# Altium PCB PCB1.PcbDoc (part 1 of 2)
Units mm, origin at the board's own origin, x right, y up, seen from the top; angles counter-clockwise.
Board outline 893.19 x 388.24 mm, 2 copper layers (Top Layer, Bottom Layer); 223 components, 120 nets, 683 pads, 243 vias.
Unrouted connection lines stored in the file: 6.
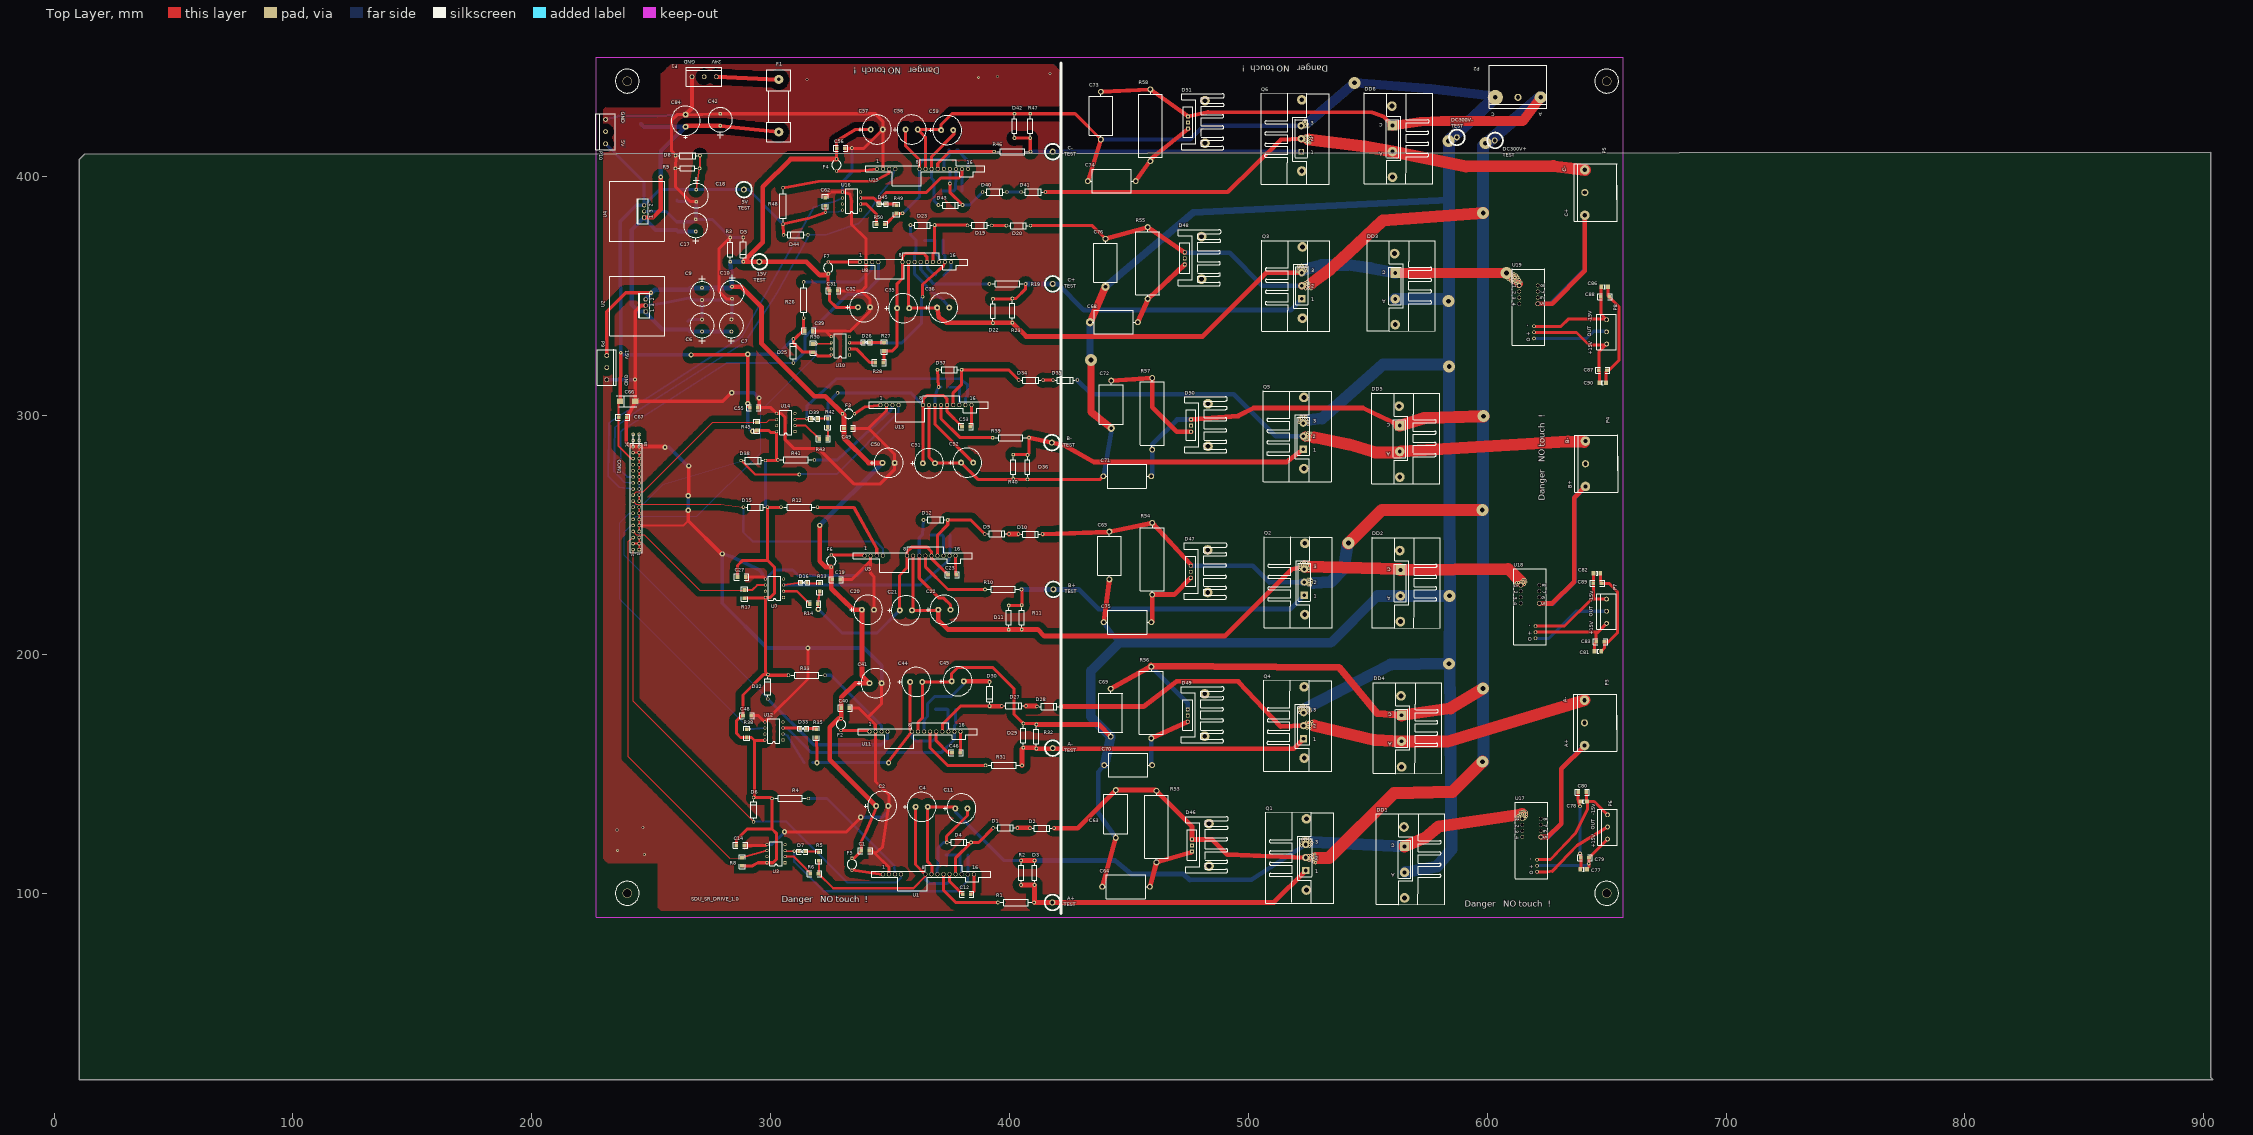
[diagram p0: Top Layer view]
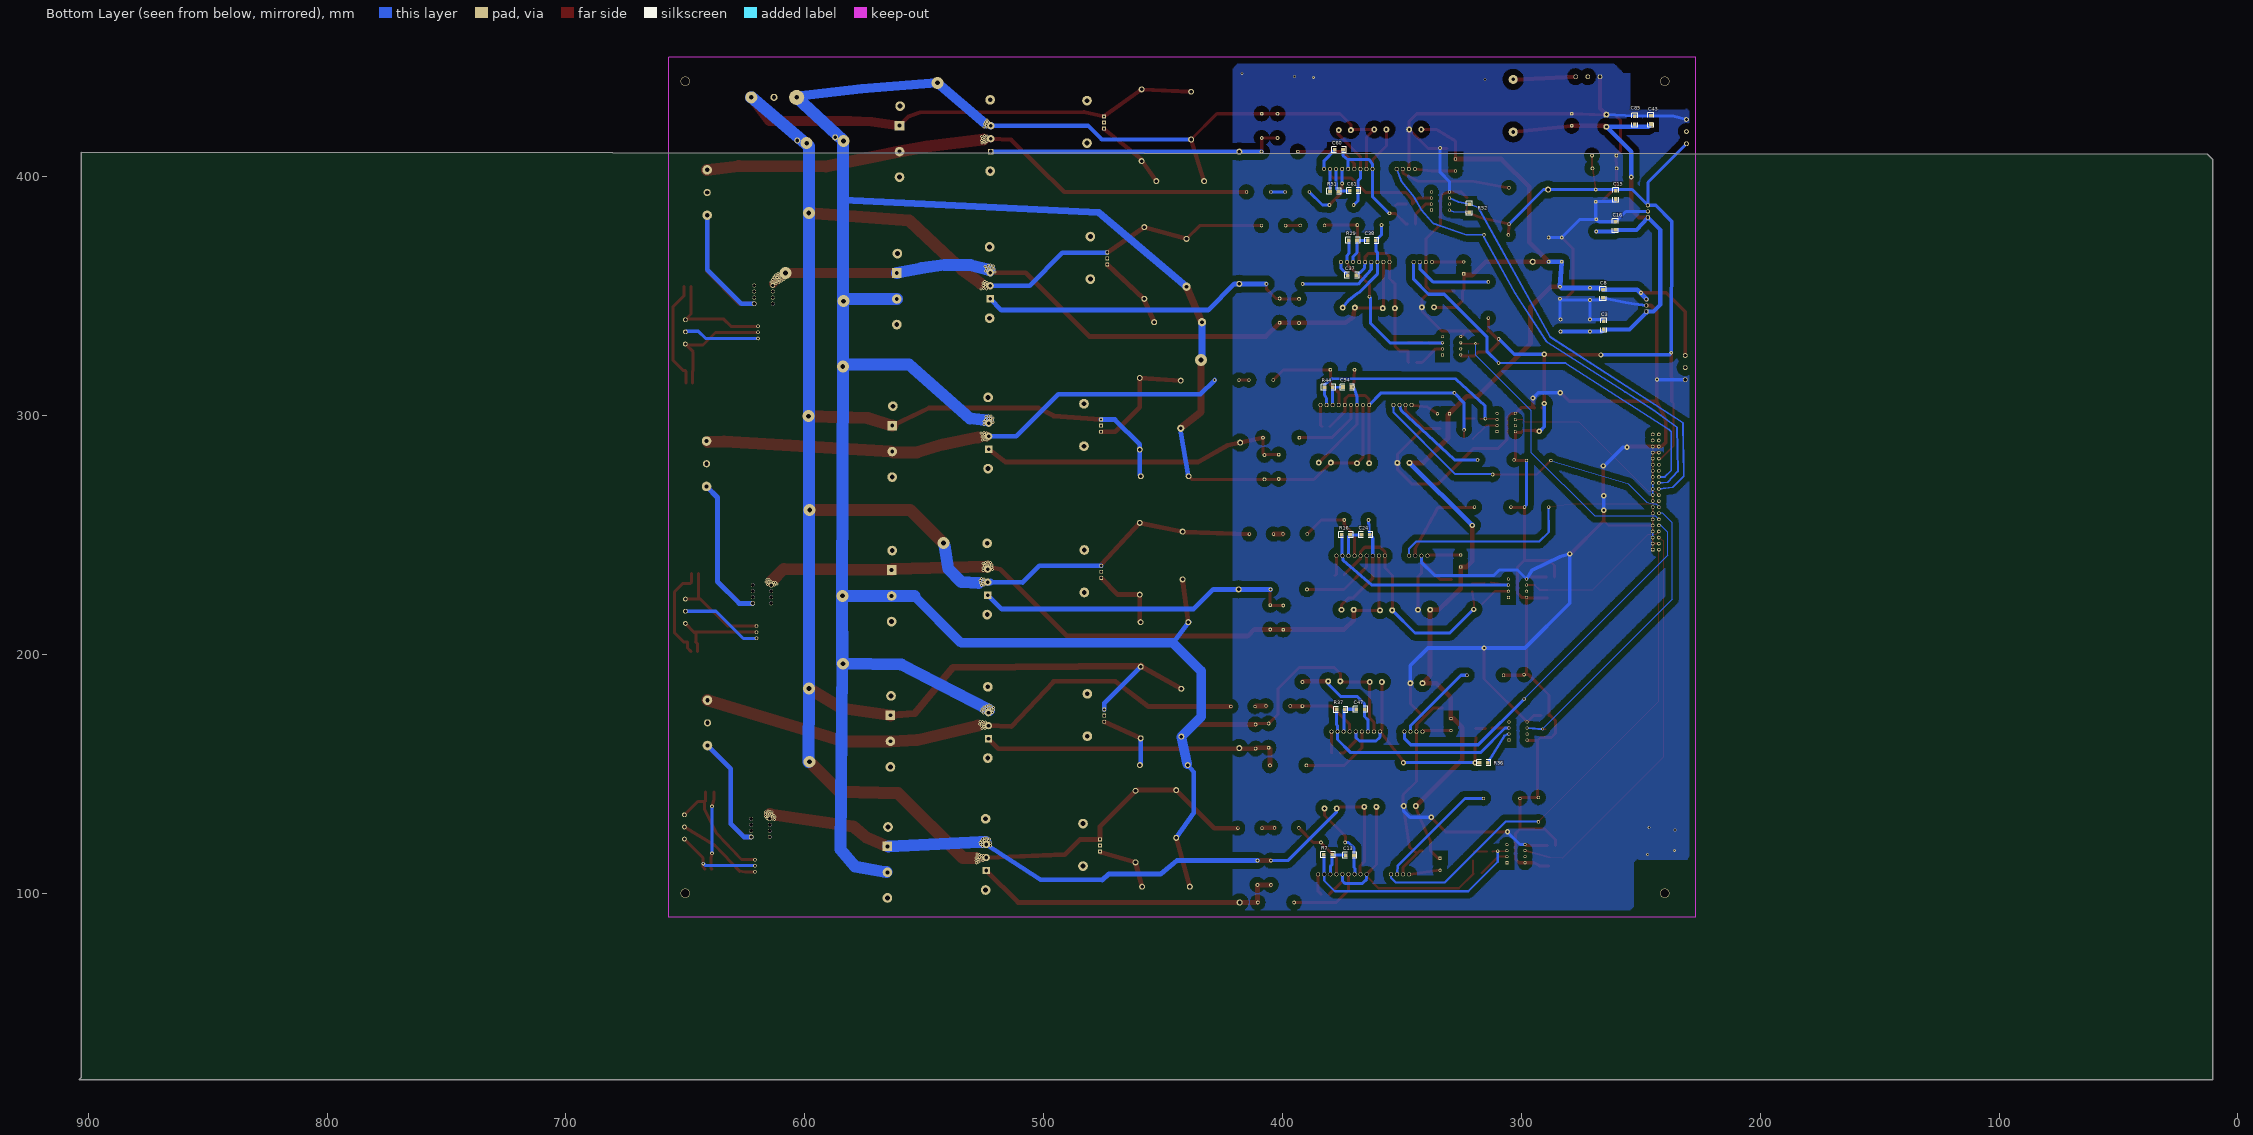
[diagram p1: Bottom Layer view, seen from below]

## Layer stack, top to bottom
Top Layer: signal copper 0.0356
Dielectric: dielectric 0.32, FR-4, Dk 4.8
Bottom Layer: signal copper 0.0356

## Board outline
12.827,409.448 10.541,407.162 10.541,21.971 903.732,21.971 902.97,22.733 902.97,410.21

## Design rules (kind name [scope] priority, off if disabled: settings)
Clearance [All] p1: gap=0.508
ComponentClearance [All] p1 off: gap=0.254 collisioncheckmode=3 verticalgap=0.254 showdistances=FALSE
HoleToHoleClearance [All] p1 off: gap=0.254 allowstackedmicrovias=TRUE
MinimumSolderMaskSliver [All] p1 off: minsoldermaskwidth=0.254
PlaneClearance [All] p1: clearance=2.032
PlaneConnect [All] p1: planeconnectstyle=Direct reliefexpansion=0.508 reliefentries=4 reliefconductorwidth=0.254 reliefairgap=0.254
PolygonConnect [All] p1: connectstyle=Direct reliefconductorwidth=0.254 reliefentries=4 polygonreliefangle="90 Angle" airgapwidth=0.254
RoutingVias [All] p1: holewidth=0.711 width=1.27 viastyle="Through Hole" minholewidth=0.711 minwidth=1.27 maxholewidth=1.27 maxwidth=2.54
SilkToSilkClearance [All] p1 off: silktosilkclearance=0.254
SilkToSolderMaskClearance SilkscreenOverComponentPads [IsPad] p1 off: minsilkscreentomaskgap=0.254 clearancetoexposedcopper=TRUE
SolderMaskExpansion [All] p1: expansion=0.102
UnConnectedPin [All] p1 off:
Width [All] p1: maxlimit=7.62 minlimit=0.254 preferedwidth=1.27 minimp=50.000000 maximp=50.000000 favimp=50.000000
21 further rules are at their usual default settings.

## Classes and differential pairs
component class main1: C63 C64 C65 C68 C69 C70 C71 C72 C73 C74 C75 C76 C77 C78 C79 C80 C81 C82 C83 C86 C87 C88 C89 C90 D46 D47 D48 D49 D50 D51 DD1 DD2 DD3 DD4 DD5 DD6 P2 P3 P4 P5 P6 P7 P8 Q1 Q2 Q3 Q4 Q5 Q6 R53 R54 R55 R56 R57 R58 U17 U18 U19
component class driveIII: C40 C41 C42 C43 C44 C45 C46 C47 C48 C49 C50 C51 C52 C53 C54 C55 C56 C57 C58 C59 C60 C61 C62 C66 C67 C84 C85 CON1 D27 D28 D29 D30 D32 D33 D34 D35 D36 D37 D38 D39 D40 D41 D42 D43 D44 D45 F1 F2 F3 F4 P1 R31 R32 R33 R35 R36 R37 R38 R39 R40 R41 R42 R43 R44 R45 R46 R47 R48 R49 R50 R51 R52 U11 U12 U13 U14 U15 U16
component class driveII: C1 C2 C3 C4 C6 C7 C8 C9 C10 C11 C12 C13 C14 C15 C16 C17 C18 C19 C20 C21 C22 C23 C24 C27 C31 C32 C35 C36 C37 C38 C39 D1 D2 D3 D4 D5 D6 D7 D8 D9 D10 D11 D12 D15 D16 D19 D20 D22 D23 D25 D26 F5 F6 F7 P9 P10 R1 R2 R3 R4 R5 R6 R7 R8 R9 R10 R11 R12 R13 R14 R16 R17 R19 R23 R26 R27 R28 R29 R30 U1 U2 U3 U4 U5 U7 U8 U10 U?

## Components (designator, comment, footprint, x,y, rotation, side; value= is the part's Value field where it differs from the comment)
C1 "Cap" 1206#1 341.376,117.729 r180 top
C2 "Cap Pol1" 电解电容1000uF#1 344.17,136.525 r0 top
C3 "Cap" 1206#1 265.43,339.471 r270 bottom
C4 "Cap Pol1" 电解电容1000uF#1 360.68,136.144 r0 top
C6 "Cap Pol1" 电解电容470uf 271.272,335.153 r270 top
C7 "Cap Pol1" 电解电容470uf 283.591,335.153 r270 top
C8 "Cap" 1206#1 265.811,349.25 r90 bottom
C9 "Cap Pol1" 电解电容470uf 271.272,353.441 r90 top
C10 "Cap Pol1" 电解电容470uf 283.845,353.949 r90 top
C11 "Cap Pol1" 电解电容1000uF#1 377.317,135.509 r0 top
C12 "预留" 1206#1 380.365,99.568 r0 top
C13 "预留" 1206#1 370.078,115.951 r0 bottom
C14 "Cap" 1206#1 285.623,120.015 r0 top
C15 "Cap" 1206#1 260.477,390.652 r90 bottom
C16 "Cap" 1206#1 260.604,381.127 r270 bottom
C17 "Cap Pol1" 电解电容470uf 268.605,377.063 r270 top
C18 "Cap Pol1" 电解电容470uf 268.859,394.589 r90 top
C19 "Cap" 1206#1 329.184,231.267 r180 top
C20 "Cap Pol1" 电解电容1000uF#1 338.201,218.694 r0 top
C21 "Cap Pol1" 电解电容1000uF#1 354.076,218.44 r0 top
C22 "Cap Pol1" 电解电容1000uF#1 370.205,218.694 r0 top
C23 "预留" 1206#1 374.269,233.299 r0 top
C24 "预留" 1206#1 363.474,250.063 r0 bottom
C27 "Cap" 1206#1 286.131,232.41 r0 top
C31 "Cap" 1206#1 328.041,352.171 r180 top
C32 "Cap Pol1" 电解电容1000uF#1 336.55,345.313 r0 top
C35 "Cap Pol1" 电解电容1000uF#1 352.933,344.932 r0 top
C36 "Cap Pol1" 电解电容1000uF#1 369.697,345.186 r0 top
C37 "预留" 1206#1 369.189,358.775 r0 bottom
C38 "预留" 1206#1 360.934,373.253 r0 bottom
C39 "Cap" 1206#1 314.198,335.407 r0 top
C40 "Cap" 1206#1 332.994,177.546 r180 top
C41 "Cap Pol1" 电解电容1000uF#1 341.376,187.96 r0 top
C42 "Cap Pol1" 电解电容470uf 278.892,421.259 r270 top
C43 "Cap" 1206#1 245.745,425.45 r270 bottom
C44 "Cap Pol1" 电解电容1000uF#1 358.394,188.468 r0 top
C45 "Cap Pol1" 电解电容1000uF#1 375.793,188.722 r0 top
C46 "预留" 1206#1 375.92,158.75 r0 top
C47 "预留" 1206#1 365.633,177.038 r0 bottom
C48 "Cap" 1206#1 288.417,174.371 r0 top
C49 "Cap" 1206#1 334.137,294.64 r180 top
C50 "Cap Pol1" 电解电容1000uF#1 346.837,280.162 r0 top
C51 "Cap Pol1" 电解电容1000uF#1 363.728,280.035 r0 top
C52 "Cap Pol1" 电解电容1000uF#1 379.73,280.289 r0 top
C53 "预留" 1206#1 380.111,295.402 r0 top
C54 "预留" 1206#1 371.221,311.912 r0 bottom
C55 "Cap" 1206#1 291.211,303.276 r0 top
C56 "Cap" 1206#1 331.089,411.861 r180 top
C57 "Cap Pol1" 电解电容1000uF#1 341.884,419.735 r0 top
C58 "Cap Pol1" 电解电容1000uF#1 356.489,419.735 r0 top
C59 "Cap Pol1" 电解电容1000uF#1 371.348,419.481 r0 top
C60 "预留" 1206#1 374.65,411.226 r0 bottom
C61 "预留" 1206#1 368.427,394.081 r0 bottom
C62 "Cap" 1206#1 322.834,387.858 r90 top
C63 "Cap" 无感电容15*6#1 444.5,123.19 r90 top
C64 "Cap" 无感电容15*6#1 438.785,102.743 r0 top
C65 "Cap" 无感电容15*6#1 441.833,231.394 r90 top
C66 "Cap Pol1" 7343 240.157,305.943 r0 top
C67 "Cap" 1206#1 239.776,299.339 r180 top
C68 "Cap" 无感电容15*6#2 433.705,339.09 r0 top
C69 "Cap" 无感电容15*6#1 442.341,165.608 r90 top
C70 "Cap" 无感电容15*6#1 439.674,153.67 r0 top
C71 "Cap" 无感电容15*6#1 439.293,274.574 r0 top
C72 "Cap" 无感电容15*6#3 442.595,294.64 r90 top
C73 "Cap" 无感电容15*6#1 438.277,415.544 r90 top
C74 "Cap" 无感电容15*6#1 432.816,398.145 r0 top
C75 "Cap" 无感电容15*6#1 439.42,213.487 r0 top
C76 "Cap" 无感电容15*6#2 440.182,353.949 r90 top
C77 "Cap Pol1" 1206#2 640.334,110.109 r180 top
C78 "Cap Pol1" 1206#2 640.334,138.43 r0 top
C79 "Cap" 1206#1 639.191,114.808 r0 top
C80 "Cap" 1206#1 641.477,142.367 r180 top
C81 "Cap Pol1" 1206#2 646.303,201.295 r0 top
C82 "Cap Pol1" 1206#2 645.922,233.934 r180 top
C83 "Cap" 1206#1 649.097,205.232 r180 top
C84 "Cap Pol1" 电解电容1000uF#2 264.414,420.878 r90 top
C85 "Cap" 1206#1 252.476,425.323 r270 bottom
C86 "Cap Pol1" 1206#2 649.097,353.949 r180 top
C87 "Cap" 1206#1 650.113,318.897 r180 top
C88 "Cap" 1206#1 647.573,349.758 r0 top
C89 "Cap" 1206#1 644.398,229.743 r0 top
C90 "Cap Pol1" 1206#2 648.335,313.69 r0 top
CON1 "Header 18X2" HDR2X18 244.983,243.84 r90 top
D1 "FR107" DIODE-0.4 398.272,127.381 r0 top
D2 "FR107" DIODE-0.4 413.639,127.254 r0 top
D3 "1.5KE18CA" AXIAL0.4 410.464,113.665 r270 top
D4 "1N4751" DIODE0.4 373.761,121.285 r0 top
D5 "Diode 1N4007" DIODE0.4 288.544,374.523 r270 top
D6 "Diode 1N4007" DIODE-0.4 292.862,135.001 r90 top
D7 "LED" 0805D 313.817,116.205 r180 top
D8 "Diode 1N4007" DIODE0.4 260.223,408.813 r0 top
D9 "FR107" DIODE-0.4 394.716,250.444 r0 top
D10 "FR107" DIODE-0.4 408.813,250.317 r0 top
D11 "1.5KE18CA" AXIAL0.4 399.669,210.312 r90 top
D12 "1N4751" DIODE0.4 363.982,256.286 r0 top
D15 "Diode 1N4007" DIODE-0.4 293.624,261.62 r0 top
D16 "LED" 0805D 314.579,228.854 r180 top
D19 "FR107" DIODE-0.4 387.477,379.603 r0 top
D20 "FR107" DIODE-0.4 403.733,379.476 r0 top
D22 "1.5KE18CA" AXIAL0.4 393.065,338.709 r90 top
D23 "1N4751" DIODE0.4 358.521,379.73 r0 top
D25 "Diode 1N4007" DIODE-0.4 309.499,327.025 r90 top
D26 "LED" 0805D 340.741,329.438 r180 top
D27 "FR107" DIODE-0.4 401.828,178.435 r0 top
D28 "FR107" DIODE-0.4 416.56,178.181 r0 top
D29 "1.5KE18CA" AXIAL0.4 405.765,171.069 r270 top
D30 "1N4751" DIODE0.4 391.668,188.468 r270 top
D32 "Diode 1N4007" DIODE-0.4 298.831,186.436 r90 top
D33 "LED" 0805D 314.198,167.767 r180 top
D34 "FR107" DIODE-0.4 408.94,314.833 r0 top
D35 "FR107" DIODE-0.4 423.291,314.833 r0 top
D36 "1.5KE18CA" AXIAL0.4 407.543,273.304 r90 top
D37 "1N4751" DIODE0.4 369.824,319.151 r0 top
D38 "Diode 1N4007" DIODE-0.4 292.735,281.178 r0 top
D39 "LED" 0805D 318.897,297.434 r180 top
D40 "FR107" DIODE-0.4 393.827,393.573 r0 top
D41 "FR107" DIODE-0.4 409.956,393.573 r0 top
D42 "1.5KE18CA" AXIAL0.4 402.082,426.339 r270 top
D43 "1N4751" DIODE0.4 370.205,388.112 r0 top
D44 "Diode 1N4007" DIODE-0.4 310.515,375.666 r180 top
D45 "LED" 0805D 347.472,387.35 r180 top
D46 "MUR860 8A/600V" TO-220_SANRE 476.377,122.555 r180 top
D47 "MUR860 8A/600V" TO-220_SANRE 475.869,237.109 r180 top
D48 "MUR860 8A/600V" TO-220_SANRE 473.329,368.3 r180 top
D49 "MUR860 8A/600V" TO-220_SANRE 474.599,176.911 r180 top
D50 "MUR860 8A/600V" TO-220_SANRE 475.996,298.323 r180 top
D51 "MUR860 8A/600V" TO-220_SANRE 474.726,425.196 r180 top
DD1 "RURG8060" TO247dio 565.15,119.634 r180 top
DD2 "RURG8060" TO247dio 563.372,235.331 r180 top
DD3 "RURG8060" TO247dio 561.213,359.664 r180 top
DD4 "RURG8060" TO247dio 563.88,174.498 r180 top
DD5 "RURG8060" TO247dio 563.118,295.783 r180 top
DD6 "RURG8060" TO247dio 560.07,421.386 r180 top
F1 "Fuse 1　4A" FUSE 303.403,440.69 r270 top
F2 "Fuse 1　2A" CAPR5-4X5 329.438,170.688 r270 top
F3 "Fuse 1　2A" CAPR5-4X5 332.613,300.736 r0 top
F4 "Fuse 1　2A" CAPR5-4X5 327.533,404.876 r270 top
F5 "Fuse 1　2A" CAPR5-4X5 334.01,112.141 r270 top
F6 "Fuse 1　2A" CAPR5-4X5 325.374,239.141 r90 top
F7 "Fuse 1　2A" CAPR5-4X5 324.104,361.823 r90 top
P1 "Header 3" PHENOX-3 267.081,441.833 r0 top
P2 "Header 3" 端子9.5mm-3#1 621.411,442.595 r180 top
P3 "Header 3" 端子9.5mm-3#2 650.113,162.814 r90 top
P4 "Header 3" 端子9.5mm-3#2 650.494,271.272 r90 top
P5 "Header 3" 端子9.5mm-3#3 650.24,384.81 r90 top
P6 "SEN_A" PHENOX-3 650.367,122.682 r90 top
P7 "SEN_B" PHENOX-3 649.986,212.979 r90 top
P8 "SEN_C" PHENOX-3 649.986,329.946 r90 top
P9 "预留不焊" PHENOX-3 231.394,325.12 r270 top
P10 "预留不焊" PHENOX-3 230.886,413.766 r90 top
Q1 "IGBT-N" TO247#1 524.002,109.474 r0 top
Q2 "IGBT-N" TO247#1 523.367,224.79 r0 top
Q3 "IGBT-N" TO247#2 522.351,348.869 r0 top
Q4 "IGBT-N" TO247#3 523.113,164.719 r0 top
Q5 "IGBT-N" TO247#1 522.986,285.877 r0 top
Q6 "IGBT-N" TO247#4 522.097,410.464 r0 top
R1 "5R" AXIAL0.6 395.097,96.139 r0 top
R2 "10K" AXIAL0.4 404.876,113.665 r270 top
R3 "Res2" AXIAL0.4 283.083,374.523 r270 top
R4 "100R" AXIAL-0.6 308.229,139.7 r180 top
R5 "Res2" 1206#1 320.167,117.094 r270 top
R6 "Res2" 1206#1 316.611,108.204 r0 top
R7 "预留" 1206#1 382.651,116.078 r180 bottom
R8 "Res2" 1206#1 288.036,114.935 r270 top
R9 "Res2" AXIAL0.4 260.096,403.479 r0 top
R10 "5R" AXIAL0.6 389.763,227.203 r0 top
R11 "10K or更大？33k？" AXIAL0.4 405.13,210.439 r90 top
R12 "Res2" AXIAL-0.6 312.039,261.62 r180 top
R13 "Res2" 1206#1 320.548,229.743 r270 top
R14 "Res2" 1206#1 316.357,221.107 r0 top
R16 "预留" 1206#1 375.158,250.063 r180 bottom
R17 "Res2" 1206#1 289.052,226.949 r270 top
R19 "5R" AXIAL0.6 391.541,355.092 r0 top
R23 "10K or更大？33k？" AXIAL0.4 401.193,338.836 r90 top
R26 "Res2" AXIAL-0.6 313.817,348.361 r270 top
R27 "Res2" 1206#1 347.472,330.454 r270 top
R28 "Res2" 1206#1 343.789,322.199 r0 top
R29 "预留" 1206#1 372.237,373.38 r180 bottom
R30 "Res2" 1206#1 317.754,329.946 r270 top
R31 "5R" AXIAL0.6 390.017,153.543 r0 top
R32 "10K or更大？33k？" AXIAL0.4 411.226,170.688 r270 top
R33 "Res2" AXIAL-0.6 315.087,191.262 r180 top
R35 "Res2" 1206#1 319.024,168.656 r270 top
R36 "Res2" 1206#1 314.071,154.686 r0 bottom
R37 "预留" 1206#1 377.317,176.911 r180 bottom
R38 "Res2" 1206#1 289.941,168.656 r270 top
R39 "5R" AXIAL0.6 392.938,290.703 r0 top
R40 "10K or更大？33k？" AXIAL0.4 401.574,273.431 r90 top
R41 "Res2" AXIAL-0.6 310.642,281.432 r180 top
R42 "Res2" 1206#1 323.977,298.704 r270 top
R43 "Res2" 1206#1 320.294,290.195 r0 top
R44 "预留" 1206#1 382.397,311.785 r180 bottom
R45 "Res2" 1206#1 294.259,297.18 r270 top
R46 "5R" AXIAL0.6 393.573,410.464 r0 top
R47 "10K or更大？33k？" AXIAL0.4 408.686,426.339 r270 top
R48 "Res2" AXIAL-0.6 305.181,387.731 r270 top
R49 "Res2" 1206#1 352.679,387.985 r270 top
R50 "Res2" 1206#1 344.297,380.111 r0 top
R51 "预留" 1206#1 380.111,393.954 r180 bottom
R52 "Res2" 1206#1 321.818,388.493 r270 bottom
R53 "5.2R" 水泥电阻22*9.5 461.518,112.903 r90 top
R54 "5.2R" 水泥电阻22*9.5 459.74,225.044 r90 top
R55 "5.2R" 水泥电阻22*9.5 457.835,348.869 r90 top
R56 "5.2R" 水泥电阻22*9.5 459.359,164.846 r90 top
R57 "5.2R" 水泥电阻22*9.5 459.74,315.722 r270 top
R58 "5.2R" 水泥电阻22*9.5 458.978,406.527 r90 top
U1 "QP12W05KS-37" QP12W05KS37 338.074,95.25 r0 top
U2 "L7815CV" TO220ABN 247.65,346.075 r90 top
U3 "TLP550" DIP8 306.07,112.776 r180 top
U4 "L7805CV" TO220ABN 247.015,385.445 r90 top
U5 "QP12W05KS-37" QP12W05KS37 330.454,228.6 r0 top
U7 "TLP550" DIP8 305.435,223.901 r180 top
U8 "QP12W05KS-37" QP12W05KS37 328.549,351.536 r0 top
U10 "TLP550" DIP8 332.994,325.374 r180 top
U11 "QP12W05KS-37" QP12W05KS37 332.486,154.94 r0 top
U12 "TLP550" DIP8 305.181,164.084 r180 top
U13 "QP12W05KS-37" QP12W05KS37 337.058,291.719 r0 top
U14 "TLP550" DIP8 310.134,293.243 r180 top
U15 "QP12W05KS-37" QP12W05KS37 335.661,390.525 r0 top
U16 "TLP550" DIP8 337.693,385.953 r180 top
U17 "电流传感器1" 电流传感器1 614.68,131.191 r270 top
U18 "电流传感器1" 电流传感器1 614.045,228.981 r270 top
U19 "电流传感器1" 电流传感器1 613.41,354.457 r270 top

## Footprints (in the part's own frame and the unit in brackets; to place one, negate y for a bottom-side part, rotate by r counter-clockwise, add the part's x,y. Pads: shape width x height; smd on the part's side, far side on the other; paste and mask are expansions set on the pad)
0805D [mil]
  rect 50x50 smd: A(-27,-48) K(73,-48)
  silkscreen extent -67,-88 113,-8
1206#1 [mil]
  rect 60x60 smd: 1(0,0) 2(135,0)
  silkscreen extent -50,-50 185,50
1206#2 [mil] "Chip Capacitor; Body 3.2 x 1.6 mm (LxW typ)"
  rect 62.99x70.87 smd: 1(-55.12,0) 2(55.12,0)
  silkscreen extent -12,-31 12,31
7343 [mm] "Capacitor, SM Tantalum; Body 7.3 x 4.3 mm (LxW typ)"
  rect 2.6x2.4 smd: 1(-3.2,0) 2(3.2,0)
  silkscreen extent -4.57,-2.3 3.8,2.42
AXIAL0.4 [mil]
  round 62 hole 32: 1(0,0) 2(400,0)
  silkscreen extent 40,-40 360,40
AXIAL0.6 [mil]
  round 62 hole 32: 1(0,0) 2(600,0)
  silkscreen extent 40,-50 560,50
AXIAL-0.6 [mm] "Axial Device, Thru-Hole; 2 Leads; 0.6 in Pin Spacing"
  round 1.4 hole 0.85: 1(-7.62,0) 2(7.62,0)
  silkscreen extent -6.6,-1.27 6.6,1.27
CAPR5-4X5 [mm] "Capacitor; 2 Leads"
  rect 1.35x1.35 hole 0.8: 1(-2.5,0)
  round 1.35 hole 0.8: 2(2.5,0)
  silkscreen extent -1.69,-2 1.82,2
DIODE0.4 [mil]
  round 62 hole 32: A(0,0) K(400,0)
  silkscreen extent 40,-50 360,50
DIODE-0.4 [mm] "Diode, Thru-Hole; 2 Leads; 0.4 in Pin Spacing"
  round 1.4 hole 0.85: 1(-5.08,0) 2(5.08,0)
  silkscreen extent -4.06,-1.27 4.06,1.27
DIP8 [mil]
  rect 50x50 hole 32: 1(0,0)
  round 50 hole 32: 2(0,-100) 3(0,-200) 4(0,-300) 5(300,-300) 6(300,-200) 7(300,-100) 8(300,0)
  silkscreen extent 50,-350 250,50
FUSE [mm]
  round 3.81 hole 1.5: 1(0,0) 2(22,0)
  silkscreen extent -4,-5 26,5
HDR2X18 [mm] "Connector; Header; 18x2 Position"
  rect 1.5x1.5 hole 0.9: 1(0,0)
  round 1.5 hole 0.9: 2(0,2.54) 3(2.54,0) 4(2.54,2.54) 5(5.08,0) 6(5.08,2.54) 7(7.62,0) 8(7.62,2.54) 9(10.16,0) 10(10.16,2.54) 11(12.7,0) 12(12.7,2.54) 13(15.24,0) 14(15.24,2.54) 15(17.78,0) 16(17.78,2.54) 17(20.32,0) 18(20.32,2.54) 19(22.86,0) 20(22.86,2.54) 21(25.4,0) 22(25.4,2.54) 23(27.94,0) 24(27.94,2.54) 25(30.48,0) 26(30.48,2.54) 27(33.02,0) 28(33.02,2.54) 29(35.56,0) 30(35.56,2.54) 31(38.1,0) 32(38.1,2.54) 33(40.64,0) 34(40.64,2.54) 35(43.18,0) 36(43.18,2.54)
  silkscreen extent -1.27,-1.27 44.45,3.81
PHENOX-3 [mm]
  round 2 hole 1.3: 1(0,0) 2(5.08,0) 3(10.16,0)
  silkscreen extent -2.54,-4.06 12.5,4.06
QP12W05KS37 [mm] "IGBT Drive"
  round 1.7 hole 1.3: 1(8.89,12.7) 2(11.43,12.7) 3(13.97,12.7) 4(16.51,12.7) 8(26.67,12.7) 9(29.21,12.7) 10(31.75,12.7) 11(34.29,12.7) 12(36.83,12.7) 13(39.37,12.7) 14(41.91,12.7) 15(44.45,12.7) 16(46.99,12.7)
  silkscreen extent 4.19,5.71 53.97,16.51
TO220ABN [mm] "TO, Thru-Hole, Vertical, Heatsink Mounted; 3 In-Line Leads; Pitch 2.54 mm; Pin sequence 1, 3, 2"
  rect 1.7x1.7 hole 1.1: 1(-2.54,0)
  round 1.7 hole 1.1: 2(2.54,0) 3(0,0)
  silkscreen extent -5.2,-1.7 5.2,2.9
TO247#1 [mm]
  rect 3x3 hole 1.6: 1(0,0)
  round 3 hole 1.6: 2(0,5.44) 3(0,10.88)
  round 4.064 hole 2.032: ""(0.254,-8.128) ""(0.254,21.717)
  silkscreen extent -16.76,-13.69 11.81,24.44
TO247#2 [mm]
  rect 3.04x3.04 hole 1.6: 1(0,0)
  round 3.04 hole 1.6: 2(0,5.44) 3(0,10.88)
  round 4.064 hole 2.032: ""(0.254,-8.128) ""(0.254,21.717)
  silkscreen extent -16.76,-13.69 11.81,24.44
TO247#3 [mm]
  rect 3x3 hole 1.6: 1(0,0)
  round 3 hole 1.6: 2(0,5.44)
  round 3.048 hole 1.6: 3(0,10.88)
  round 4.064 hole 2.032: ""(0.254,-8.128) ""(0.254,21.717)
  silkscreen extent -16.76,-13.69 11.81,24.44
TO247#4 [mm]
  rect 2.4x2.4 hole 1.6: 1(0,0)
  round 3.048 hole 1.6: 2(0,5.44) 3(0,10.88)
  round 4.064 hole 2.032: ""(0.254,-8.128) ""(0.254,21.717)
  silkscreen extent -16.76,-13.69 11.81,24.44
TO247dio [mil]
  round 157.48 hole 62.99: A(-10,428.35)
  rect 157.48x157.48 hole 62.99: C(-10,0)
  round 160 hole 80: ""(-10,850) ""(0,-320)
  silkscreen extent -670,-539 455,962
TO-220_SANRE [mil]
  rect 62x62 hole 39.37: 1(0,0) 2(0,100) 3(0,200)
  round 160 hole 80: ""(-280,440) ""(-280,-260)
  silkscreen extent -600,-375 105,550
无感电容15*6#1 [mm]
  round 2.5 hole 1.5: 1(0,0) 2(20,0)
  silkscreen extent 1.02,-5 18.92,5
无感电容15*6#2 [mm]
  round 3.5 hole 1.5: 1(0,0)
  round 2.5 hole 1.5: 2(20,0)
  silkscreen extent 1.02,-5 18.92,5
无感电容15*6#3 [mm]
  round 3 hole 1.5: 1(0,0)
  round 2.5 hole 1.5: 2(20,0)
  silkscreen extent 1.02,-5 18.92,5
水泥电阻22*9.5 [mm]
  round 2.5 hole 1.5: 1(0,0) 2(30,0)
  silkscreen extent 0.89,-5 28.83,5
电流传感器1 [mm]
  round 1.5 hole 1: 0(22.2,6.15) A(19.66,6.15) C(17.12,6.15)
  round 2 hole 1.4: 1(0,0) 5(7.62,7.75)
  round 1.6 hole 1.4: 2(2.54,0) 3(5.08,0) 4(7.62,0) 6(5.08,7.75) 7(2.54,7.75) 8(0,7.75)
  silkscreen extent -6.9,-2.92 25.02,10.67
电解电容470uf [mil] "5.04mm"
  round 62 hole 28: 1(0,0) 2(-200,0)
  silkscreen extent -300,-200 200,200
电解电容1000uF#1 [mm]
  round 2.5 hole 1.1: 1(0,0) 2(5.08,0)
  silkscreen extent -5.08,-6.1 8.64,6.1
电解电容1000uF#2 [mm]
  round 2.5 hole 1.2: 1(0,0) 2(5.08,0)
  silkscreen extent -5.08,-6.1 8.64,6.09
端子9.5mm-3#1 [mm]
  round 5.08 hole 2: 1(-0.966,9.398)
  round 3 hole 1.8: 2(8.534,9.398)
  round 6.35 hole 2: 3(18.034,9.398)
  silkscreen extent -3.47,-4.1 20.59,13.9
端子9.5mm-3#2 [mm]
  round 4 hole 1.8: 1(-0.966,9.398) 3(18.034,9.398)
  round 3 hole 1.8: 2(8.534,9.398)
  silkscreen extent -3.47,-4.1 20.59,13.9
端子9.5mm-3#3 [mm]
  round 4 hole 1.8: 1(-0.966,9.398)
  round 3 hole 1.8: 2(8.534,9.398)
  round 4 hole 2: 3(18.034,9.398)
  silkscreen extent -3.47,-4.1 20.59,13.9

## Part data
C1 C3 C8 C14 C15 C16 C19 C27 C31 C39 C40 C43 C48 C49 C55 C56 C62 C63 C64 C65 C67 C68 C69 C70 C71 C72 C73 C74 C75 C76 C79 C80 C83 C85 C87 C88 C89: "Capacitor"
C2 C4 C6 C7 C9 C10 C11 C17 C18 C20 C21 C22 C32 C35 C36 C41 C42 C44 C45 C50 C51 C52 C57 C58 C59 C66 C77 C78 C81 C82 C84 C86 C90: "Polarized Capacitor (Radial)"
C12 C23 C37 C46 C53 C60: library part Cap
C13 C24 C38 C47 C54 C61: library part Cap, "Capacitor"
CON1: "Header, 18-Pin, Dual row"
D1 D2 D5 D6 D8 D9 D10 D15 D19 D20 D25 D27 D28 D32 D34 D35 D38 D40 D41 D44 D46 D47 D48 D49 D50 D51 DD1 DD2 DD3 DD4 DD5 DD6: library part "Diode 1N4148", "High Conductance Fast Diode"
D3 D11 D22 D29 D36 D42: library part D-SMBJ5.0CA, "TVS 18V"
D4 D12 D23 D30 D37 D43: library part ZENER1, "Zener Diode 30V"
D7 D16 D26 D33 D39 D45: library part DIODE1
F1 F2 F3 F4 F5 F6 F7: library part "Fuse 1", "Fuse"
P1 P2 P3 P4 P5: "Header, 3-Pin"
P6 P7 P8 P9 P10: library part "Header 3", "Header, 3-Pin"
Q1 Q2 Q3 Q4 Q5 Q6: "Insulated Gate Bipolar Transistor (N-Channel)"
R1 R2 R4 R7 R10 R11 R16 R19 R23 R29 R31 R32 R37 R39 R40 R44 R46 R47 R51 R53 R54 R55 R56 R57 R58: library part Res2, "Resistor"
R3 R5 R6 R8 R9 R12 R13 R14 R17 R26 R27 R28 R30 R33 R35 R36 R38 R41 R42 R43 R45 R48 R49 R50 R52: "Resistor"
U2: "Positive Voltage Regulator"
U3 U7 U10 U12 U14 U16: library part HCPL4053
U4: library part L7815CV, "Positive Voltage Regulator"

## Free pads (board coordinates)
  round 1.524 hole 0.9: 0(242.442,292.103) 0(242.443,289.56) 0(244.982,292.103) 0(244.983,289.56)
  round 2.54 hole 1.524: 0(288.798,394.589) 0(295.275,364.363) 0(417.703,288.671) 0(417.957,96.139) 0(418.084,160.782) 0(418.084,355.092) 0(418.084,410.464) 0(418.338,227.203) 0(587.248,416.433) 0(603.123,415.163)

## Via types
v1: diameter 1.27, hole 0.3, Top Layer to Bottom Layer, 178 vias
v2: diameter 2.2, hole 1, Top Layer to Bottom Layer, 18 vias
v3: diameter 5, hole 2, Top Layer to Bottom Layer, 15 vias
v4: diameter 1.524, hole 0.813, Top Layer to Bottom Layer, 13 vias
v5: diameter 1.27, hole 0.711, Top Layer to Bottom Layer, 11 vias
v6: diameter 4, hole 3.5, Top Layer to Bottom Layer, 4 vias
v7: diameter 1.778, hole 0.711, Top Layer to Bottom Layer, 2 vias
v8: diameter 1.6, hole 0.8, Top Layer to Bottom Layer, 1 vias
v9: diameter 2.032, hole 0.889, Top Layer to Bottom Layer, 1 vias

## Nets (pads, with @x,y where several pads share a name; then routed paths per layer and width w, separated by ;. In a path a pad name is that pad's centre, name@x,y a point inside that pad or via, vN(x,y) a via of type N, cw(c..) or ccw(c..) an arc to the next point about the centre after c; other vN are vias at no path point)
+5V: C14.1 C15.2 C18.1 C27.1 C39.1 C48.1 C55.1 C62.1 C66.1 C67.2 CON1.32 D6.2 D8.K D15.2 D25.2 D32.2 D38.2 D44.2 P10.1 pad.0@288.798,394.589 R4.2 R8.2 R9.2 R12.2 R17.2 R26.2 R30.2 R33.2 R38.2 R41.2 R45.2 R48.2 R52.2 U3.8 U4.2 U7.8 U10.8 U12.8 U14.8 U16.8 | length 706.2
  Top Layer w0.762: C66.1@236.982,305.968 C66.1@236.957,305.943 236.347,305.333 C67.2@236.347,299.339 236.347,287.18 241.587,281.94 CON1.32@242.443,281.94 ; C18.1@268.859,394.589 269.875,401.828 R9.2@270.256,403.479 270.383,403.606 D8.K@270.383,408.813 ; C62.1@322.834,387.858 v5(322.961,385.064)
  Top Layer w1.27: C14.1@285.623,120.015 285.623,122.301 290.195,126.873 300.609,126.873 ; C27.1@286.131,232.41 286.131,237.236 288.29,239.395 298.704,239.395 ; R8.2@288.417,111.379 292.227,111.379 294.64,112.776 U3.8@298.45,112.776 300.99,112.776 302.514,114.3 302.514,124.968 300.609,126.873 ; R17.2@289.052,223.52 297.434,223.52 U7.8@297.815,223.901 ; R45.2@294.259,293.751 299.212,293.751 299.974,292.989 302.26,292.989 U14.8@302.514,293.243 302.514,281.94 R41.2@303.022,281.432 302.768,281.178 D38.2@297.815,281.178 ; U12.8@297.561,164.084 297.434,163.957 293.243,163.957 ; D15.2@298.45,261.493 D15.2@298.704,261.493 ; D15.2@298.704,261.62 D15.2@298.704,261.493 ; R12.2@304.419,261.493 D15.2@298.704,261.493 ; D44.2@305.435,375.666 R48.2@305.181,380.111 315.468,382.397 v5(322.961,385.064) ; R33.2@307.467,191.262 299.085,191.262 D32.2@298.831,191.516 ; R26.2@313.817,340.741 C39.1@313.817,335.788 ; C39.1@314.198,335.407 C39.1@313.817,335.788 ; U10.8@325.374,325.374 324.866,324.866 319.786,324.866 318.135,326.517 R30.2@317.754,326.517 313.436,326.517 309.499,330.454 D25.2@309.499,332.105 310.134,332.105 C39.1@313.817,335.788 ; 293.243,163.957 291.973,165.227 R38.2@289.941,165.227 287.401,165.227 285.75,166.878 285.75,172.339 287.782,174.371 C48.1@288.417,174.371 288.417,183.007 296.926,191.516 D32.2@298.831,191.516 ; 293.243,163.957 293.243,140.462 D6.2@292.862,140.081 300.228,140.081 R4.2@300.609,139.7 300.609,126.873 ; U7.8@297.815,223.901 299.974,223.901 301.625,225.552 301.625,236.474 298.704,239.395 ; U7.8@297.815,223.901 297.815,192.532 D32.2@298.831,191.516 ; 298.704,239.395 D15.2@298.704,261.493
  Top Layer w1.5: C66.1@236.982,305.968 v8(237.236,326.263) ; v2(266.7,325.374) v2@290.195,325.374 ; v2(290.449,325.628) v2(290.449,305.054) 290.449,304.038 C55.1@291.211,303.276 ; v2(292.481,293.37) 293.878,293.37 R45.2@294.259,293.751
  Bottom Layer w0.762: R52.2@321.818,385.064 322.959,385.108 328.422,385.318 U16.8@330.073,385.953
  Bottom Layer w1.27: P10.1@230.886,413.766 247.015,397.637 U4.2@247.015,387.985 253.619,394.589 C18.1@268.859,394.589 290.703,394.589 R48.2@305.181,380.111 ; D38.2@297.815,281.178 297.815,262.509 D15.2@298.704,261.62
  Bottom Layer w1.5: U4.2@247.015,387.985 243.713,387.985 236.982,381.254 v8(237.236,326.263) 238.125,325.374 v2(266.7,325.374) v2@266.827,325.374 ; v2(290.449,305.054) 290.449,295.275 v2@292.227,293.497 ; v2(290.449,325.628) 303.022,325.628 D25.2@309.499,332.105
+15V: C1.2 C2.1 C8.2 C9.1 C10.1 C19.2 C20.1 C31.2 C32.1 C40.2 C41.1 C49.2 C50.1 C56.2 C57.1 D5.K F2.1 F3.1 F4.1 F5.1 F6.1 F7.1 P9.1 pad.0@295.275,364.363 R3.2 U2.2 | length 569.9
  Top Layer w1.27: F7.1@324.104,359.323 324.104,352.679 C31.2@324.612,352.171 324.612,348.107 327.406,345.313 C32.1@336.55,345.313 ; C19.2@325.374,231.267 C19.2@325.374,231.648 ; F4.1@327.533,407.503 327.533,411.861 327.533,414.909 335.534,419.735 C57.1@341.884,419.735 ; F2.1@329.438,173.188 F2.1@329.565,173.315 ; F5.1@334.01,114.641 334.859,114.641 C1.2@337.947,117.729 337.947,121.666 339.979,125.843 C2.1@344.424,136.271
  Top Layer w1.524: P9.1@231.394,325.12 231.394,343.408 239.395,351.409 v7(249.936,351.409)
  Top Layer w2: C10.1@283.845,353.949 287.782,353.949 296.164,345.567 296.164,330.2 318.262,308.102 322.874,308.102 330.708,300.268 C49.2@330.708,294.64 330.708,290.449 340.995,280.162 C50.1@346.837,280.162 ; v2(320.548,254) 320.548,239.014 322.921,236.641 F6.1@325.374,236.641 C19.2@325.374,231.648 ; F7.1@324.104,359.323 323.556,358.775 320.548,358.775 314.96,364.363 D5.K@288.544,364.363 296.672,372.491 296.672,395.732 308.316,407.376 F4.1@327.533,407.376 ; C19.2@325.374,231.267 325.374,227.584 334.645,218.694 C20.1@338.201,218.694 338.201,191.135 C41.1@341.376,187.96 335.534,187.96 329.565,181.991 C40.2@329.565,177.546 F2.1@329.565,173.315 ; F2.1@329.438,173.188 328.509,173.188 324.739,169.418 324.739,155.956 C2.1@344.17,136.525
  Bottom Layer w1.27: C10.1@283.337,353.441 C10.1@283.845,353.949
  Bottom Layer w2: U2.2@247.65,348.83 251.499,352.679 C8.2@265.811,352.679 266.573,353.441 C9.1@271.272,353.441 C10.1@283.337,353.441 ; C10.1@283.845,353.949 R3.2@283.083,364.363 D5.K@288.544,364.363 ; v2@320.421,254.127 v2(320.548,254) C50.1@346.837,280.162
+15V_C: C77.1 C79.2 C81.1 C83.2 C87.2 C90.1 P6.1 P7.1 P8.1 U17.A U18.A U19.A | length 128.2
  Top Layer w1.27: U19.A@619.56,334.797 637.388,334.797 642.62,329.565 P8.1@649.605,329.565 ; U18.A@620.195,209.321 646.328,209.321 ; C77.1@641.734,110.109 642.62,110.995 C79.2@642.62,114.808 650.367,122.555 P6.1@650.367,122.682 ; C81.1@644.903,201.295 644.903,204.467 C83.2@645.668,205.232 645.541,205.359 645.541,208.534 646.328,209.321 ; C90.1@646.935,313.69 646.935,318.646 C87.2@646.684,318.897 646.684,326.644 P8.1@649.605,329.565 ; P7.1@649.986,212.979 646.328,209.321 ; P8.1@649.986,329.946 P8.1@649.605,329.565
  Bottom Layer w1.27: U17.A@620.83,111.531 641.502,111.531 v4@642.493,112.522
  other v4: 642.493,112.395
+24V: C3.2 C6.1 C7.1 C16.2 C17.1 C42.1 C43.2 C84.1 C85.2 F1.2 U2.1 U4.1 | length 214.8
  Top Layer w1.778: U4.1@247.015,382.905 250.698,382.905 254,386.207 v9(254,399.796) ; C84.1@264.414,420.878 264.795,421.259 C42.1@278.892,421.259 F1.2@303.403,418.69
  Bottom Layer w1.778: C43.2@245.745,422.021 246.888,420.878 C84.1@264.414,420.878 254,410.464 v9(254,399.796) ; U2.1@247.65,343.066 254.674,336.042 C3.2@265.43,336.042 266.319,335.153 C6.1@271.272,335.153 C7.1@283.591,335.153 ; U2.1@247.65,343.535 244.729,343.535 241.808,346.456 241.808,377.698 U4.1@247.015,382.905 251.753,377.698 C16.2@260.604,377.698 261.239,377.063 C17.1@268.605,377.063
-15V_C: C78.2 C80.1 C82.2 C86.2 C88.1 C89.1 P6.3 P7.3 P8.3 U17.C U18.C U19.C | length 142.1
  Top Layer w1.27: U19.C@619.56,337.337 630.834,337.337 633.857,340.36 P8.3@649.732,340.36 ; U18.C@620.195,211.861 632.358,211.861 643.636,223.139 644.525,223.139 ; U17.C@620.83,114.071 626.491,114.173 637.032,125.222 641.985,135.226 641.985,138.179 C78.2@641.734,138.43 ; C80.1@641.477,142.367 641.477,138.687 C78.2@641.734,138.43 ; C82.2@644.522,233.934 644.522,229.867 C89.1@644.398,229.743 644.398,223.266 644.525,223.139 ; C86.2@647.697,353.949 647.697,349.882 C88.1@647.573,349.758 647.573,342.519 P8.3@649.732,340.36 ; P7.3@649.986,223.139 644.525,223.139 ; P8.3@649.986,340.106 P8.3@649.732,340.36 ; P6.3@650.367,132.842 644.779,138.43 C78.2@641.734,138.43
A_CURRENT: P6.2 U17.0 | length 36.3
  Top Layer w1.27: U17.0@620.83,108.991 624.992,108.991 627.253,109.22 637.54,120.015 P6.2@650.367,127.762
B_CURRENT: P7.2 U18.0 | length 34.6
  Bottom Layer w1.27: U18.0@620.195,206.781 620.347,206.629 625.729,206.629 637.159,218.059 P7.2@649.986,218.059
C_CURRENT: P8.2 U19.0 | length 31.8
  Bottom Layer w1.27: U19.0@619.56,332.257 641.502,332.257 644.525,335.28 649.732,335.28 P8.2@649.986,335.026
GND: C1.1 C2.2 C3.1 C6.2 C7.2 C8.1 C9.2 C10.2 C14.2 C15.1 C16.1 C17.2 C18.2 C19.1 C20.2 C27.2 C31.1 C32.2 C39.2 C40.1 C41.2 C42.2 C43.1 C48.2 C49.1 C50.2 C55.2 C56.1 C57.2 C62.2 C66.2 C67.1 C84.2 C85.1 CON1.1 CON1.3 CON1.4 CON1.5 CON1.7 CON1.9 CON1.11 CON1.13 CON1.15 CON1.17 CON1.19 CON1.21 CON1.23 CON1.25 CON1.27 CON1.29 CON1.31 CON1.33 CON1.34 CON1.35 CON1.36 D5.A D8.A P1.1 P9.3 P10.3 R3.1 R9.1 U1.2 U2.3 U3.5 U4.3 U5.2 U7.5 U8.2 U10.5 U11.2 U12.5 U13.2 U14.5 U15.2 U16.5 | length 1334.9
  Top Layer w0.762: C67.1@239.776,299.339 C67.1@239.966,299.212 ; C67.1@239.985,299.287 C67.1@240.03,299.466 ; CON1.4@242.443,246.38 CON1.3@244.983,246.38 ; CON1.34@242.443,284.48 CON1.33@244.983,284.48 ; C66.2@243.266,305.562 C66.2@243.357,305.943 ; CON1.1@244.983,243.84 CON1.3@244.983,246.38 ; CON1.5@244.983,248.92 CON1.3@244.983,246.38 ; CON1.7@244.983,251.46 CON1.9@244.983,254 ; CON1.15@244.983,261.62 CON1.13@244.983,259.08 CON1.11@244.983,256.54 CON1.9@244.983,254 ; CON1.17@244.983,264.16 CON1.19@244.983,266.7 ; CON1.23@244.983,271.78 CON1.25@244.983,274.32 CON1.27@244.983,276.86 CON1.29@244.983,279.4 CON1.31@244.983,281.94 CON1.33@244.983,284.48 ; CON1.35@244.983,287.02 CON1.33@244.983,284.48 ; C84.2@264.287,425.831 C84.2@264.414,425.958 ; 265.557,255.905 263.652,254 CON1.9@244.983,254
  Top Layer w1.27: C84.2@264.287,425.831 264.418,425.836 C42.2@278.892,426.339 343.789,426.339 346.964,423.164 C57.2@346.964,419.735 ; C84.2@264.414,425.958 260.858,425.958 258.445,423.545 258.572,410.591 260.35,408.813 260.35,408.81 260.223,403.606 R9.1@260.096,403.479 260.096,395.859 266.446,389.509 C18.2@268.859,389.509 ; R3.1@283.083,374.523 278.384,369.824 278.384,352.044 281.559,348.869 C10.2@283.845,348.869 ; C14.2@289.052,120.015 298.069,120.015 U3.5@298.45,120.396 ; C27.2@289.56,232.41 296.926,232.41 U7.5@297.815,231.521 ; C48.2@291.846,174.371 294.894,174.371 U12.5@297.561,171.704 315.595,189.738 v2@315.595,202.819 ; C55.2@294.64,303.276 300.101,303.276 U14.5@302.514,300.863 304.419,300.863 305.943,299.339 305.943,290.068 309.88,286.131 320.167,286.131 335.026,271.272 345.694,271.272 351.917,277.495 C50.2@351.917,280.162 351.917,283.718 340.995,294.64 ; v2(305.816,125.73) 331.724,125.73 v2@337.693,131.699 ; C39.2@317.627,335.407 322.961,335.407 ; C62.2@322.834,391.287 325.12,393.573 U16.5@330.073,393.573 333.121,392.811 333.883,389.763 333.883,379.984 339.979,373.888 U8.2@339.979,364.236 339.979,354.076 338.074,352.171 ; U10.5@325.374,332.994 322.961,335.407 ; C31.1@328.041,352.171 338.074,352.171 ; C19.1@329.184,231.267 333.883,231.267 341.884,239.268 ; C56.1@331.089,411.861 339.09,411.861 C57.2@346.964,419.735 ; C40.1@332.994,177.546 336.931,177.546 340.741,173.736 ; C49.1@334.137,294.64 340.995,294.64 ; C1.1@341.376,117.729 342.646,117.729 343.726,116.649 ; U5.2@341.884,241.3 341.884,239.268 ; C20.2@343.281,218.694 343.281,232.537 341.884,233.934 341.884,239.268 ; C41.2@346.456,187.96 346.456,179.451 340.741,173.736 ; U15.2@347.091,403.225 347.091,419.608 C57.2@346.964,419.735 ; U13.2@348.488,304.419 348.488,302.133 340.995,294.64 ; C2.2@349.25,136.525 349.504,136.779 349.504,141.224 343.916,146.812 U11.2@343.916,167.64 343.789,170.688 340.741,173.736 ; C2.2@349.377,136.017 346.813,119.253 343.726,116.649 ; U1.2@349.504,107.95 349.504,110.871 343.726,116.649 ; 322.961,335.407 333.375,335.407 341.63,343.662 C32.2@341.63,345.313 341.63,348.615 338.074,352.171
  Top Layer w1.5: C67.1@239.966,299.212 C66.2@243.266,305.562 ; C67.1@239.985,299.287 239.522,297.434 239.522,288.671 241.173,287.02 CON1.36@242.443,287.02 CON1.35@244.983,287.02 v2@255.905,287.02 ; U2.3@247.65,346.075 245.745,346.075 243.357,343.687 C66.2@243.357,305.943 279.908,305.943 v2@283.464,309.499 ; v2(265.557,260.35) 265.557,255.905 v2@279.654,241.808 ; v2@265.684,266.192 v2(265.684,278.892) ; C55.2@294.64,303.276 295.148,303.784 v2(295.148,307.34)
  Top Layer w1.778: C84.2@264.414,425.958 267.081,428.625 P1.1@267.081,441.833
  Bottom Layer w0.762: v7@243.205,314.96 v7@243.332,315.087 ; CON1.5@244.983,248.92 CON1.7@244.983,251.46 ; CON1.19@244.983,266.7 CON1.21@244.983,269.24 CON1.23@244.983,271.78 ; C85.1@252.349,425.45 C85.1@252.476,425.323
  Bottom Layer w1.27: P10.3@230.886,423.926 236.601,425.45 C43.1@245.745,425.45 C85.1@252.349,425.45 ; U4.3@247.015,385.445 256.286,385.445 C16.1@260.604,381.127 267.589,381.127 C17.2@268.605,382.143 ; U2.3@247.65,346.075 252.603,346.71 256.413,347.345 C8.1@265.811,349.25 266.7,348.361 C9.2@271.272,348.361 ; C85.1@252.476,425.323 C84.2@264.414,425.958 ; C15.1@260.731,390.144 261.366,389.509 C18.2@268.859,389.509 268.859,382.397 C17.2@268.605,382.143 ; C3.1@265.43,339.471 266.192,340.233 C6.2@271.272,340.233 C9.2@271.272,348.361 ; C7.2@283.591,340.233 283.845,340.487 C10.2@283.845,348.869 283.337,348.361 C9.2@271.272,348.361 ; D5.A@288.544,374.523 R3.1@283.083,374.523 275.463,382.143 C17.2@268.605,382.143 ; U7.5@297.815,231.521 301.625,235.331 309.245,235.331 311.531,233.045 336.296,233.045 341.884,238.633 U5.2@341.884,241.3 ; U3.5@298.45,120.396 300.609,120.396 v2@305.816,125.603 ; U16.5@330.073,393.573 330.073,397.891 334.01,401.828 v4(334.01,411.988) ; v2(337.693,131.826) 346.71,131.826 349.25,134.366 C2.2@349.25,136.525
  Bottom Layer w1.5: v2(255.778,286.766) 257.429,286.766 v2@265.43,278.765 ; v2(265.557,260.35) v2(265.557,266.446) ; v2(283.718,309.499) 292.862,309.499 v2@295.148,307.213 ; U7.5@297.688,231.775 295.529,235.204 283.845,240.919 v2(279.781,242.062) 279.781,221.361 298.45,202.692 339.09,202.692 346.456,195.326 C41.2@346.456,187.96
  Bottom Layer w1.524: P9.3@231.394,314.96 v7@243.205,314.96
  other v2: 315.595,202.692
  other v5: 247.142,116.205 235.966,117.983 235.712,126.492 246.507,127.508 315.214,440.69 387.096,441.579 394.97,441.96 416.941,443.23
  other v7: 243.205,315.087
GND_C: C77.2 C78.1 C79.1 C80.2 C81.2 C82.1 C83.1 C86.1 C87.1 C88.2 C89.2 C90.2 | length 118.8
  Top Layer w1.27: C80.2@638.048,142.367 638.048,139.316 v4(638.81,136.398) ; v4(638.81,116.713) C79.1@639.191,114.808 639.191,110.366 C77.2@638.934,110.109 ; C82.1@647.322,233.934 647.322,230.248 C89.2@647.827,229.743 651.002,229.743 654.558,226.187 654.558,209.042 650.748,205.232 C83.1@649.097,205.232 649.097,202.689 C81.2@647.703,201.295 ; C90.2@649.735,313.69 649.735,318.519 C87.1@650.113,318.897 651.002,318.897 655.193,323.088 655.193,345.567 C88.2@651.002,349.758 650.497,350.263 C86.1@650.497,353.949
  Bottom Layer w1.27: v4(638.81,116.713) v4(638.81,136.398)
NetC4_1: C4.1 C12.1 R5.2 R6.2 U1.8 U1.12 | length 112.3
  Top Layer w0.508: R6.2@320.04,108.204 R6.2@320.167,108.331
  Top Layer w0.889: R6.2@320.04,108.204 326.136,102.108 359.791,102.108 364.744,107.061 U1.8@364.744,107.95 ; R6.2@320.167,108.331 R5.2@320.167,113.665
  Top Layer w1.27: C4.1@360.68,136.144 360.68,112.014 U1.8@364.744,107.95 ; U1.12@374.904,107.95 374.904,105.029 C12.1@380.365,99.568
  Bottom Layer w1.27: U1.8@364.744,107.95 364.744,105.918 366.522,104.14 373.888,104.14 374.904,105.156 U1.12@374.904,107.95
NetC4_2: C4.2 C11.1 D3.1 DD1.C Q1.3 R2.1 U1.9 U17.1 | length 298.5
  Top Layer w0.889: U1.9@367.284,107.95 U1.9@367.538,108.204
  Top Layer w1.27: U1.9@367.538,108.204 367.538,111.379 365.76,113.157 C4.2@365.76,136.144 376.682,136.144 C11.1@377.317,135.509 ; DD1.C@564.684,120.354 DD1.C@565.404,119.634
  Top Layer w2: R2.1@404.876,113.665 D3.1@410.464,113.665
  Top Layer w5: DD1.C@565.404,119.634 574.167,123.317 579.755,128.016 v1@614.553,133.096
  Bottom Layer w1.27: C11.1@377.317,135.509 377.317,134.112 397.764,113.665 R2.1@404.876,113.665
  Bottom Layer w2: D3.1@410.464,113.665 444.119,113.665 450.977,108.077 472.694,108.077 475.488,105.537 501.396,105.791 Q1.3@524.002,120.354
  Bottom Layer w5: Q1.3@524.256,121.539 524.554,121.524 524.737,121.515 525.46,121.479 525.529,121.476 525.706,121.467 525.751,121.465 525.871,121.458 526.466,121.429 526.549,121.425 DD1.C@565.023,119.507
  other v1: 525.653,119.507 522.224,119.888 525.653,120.396 526.415,120.396 522.224,120.777 526.542,121.285 525.526,121.412 522.351,121.539 522.986,122.047 524.764,122.047 525.907,122.174 524.002,122.301 522.605,122.682 525.526,122.809 523.621,123.19 524.637,123.19 612.648,130.937 613.41,131.064 615.823,131.318 612.394,131.953 613.537,131.953 616.458,132.08 614.426,132.334 615.442,132.334 612.902,132.588 613.791,133.096 616.458,133.096 614.807,133.223 615.569,133.223 613.664,134.112 616.331,134.112 614.553,134.239 615.442,134.366
NetC11_2: C11.2 C13.1 D4.A U1.10 | length 33.8
  Top Layer w1.27: D4.A@373.761,121.285 373.634,121.412 373.634,123.825 382.397,132.588 C11.2@382.397,135.509
  Bottom Layer w1.27: U1.10@369.824,107.95 369.697,108.077 369.697,110.363 370.078,110.744 C13.1@370.078,115.951 370.078,118.999 372.364,121.285 D4.A@373.761,121.285
NetC12_2: C12.2 U1.16 | length 8.9
  Top Layer w1.27: C12.2@383.794,99.568 385.064,100.838 U1.16@385.064,107.95
NetC13_2: C13.2 R7.2 U1.14 | length 14.2
  Bottom Layer w1.27: C13.2@373.507,115.951 379.095,115.951 R7.2@379.222,116.078 379.222,112.014 379.984,111.252 U1.14@379.984,107.95
NetC21_1: C21.1 C23.1 R13.2 R14.2 U5.8 U5.12 | length 100.3
  Top Layer w0.381: R14.2@319.786,221.107 R14.2@319.849,221.171
  Top Layer w0.889: R14.2@319.786,221.107 319.786,218.948 v2(319.913,218.821) ; R14.2@319.849,221.171 R13.2@320.548,226.314
  Top Layer w1.27: C21.1@354.076,218.44 353.949,218.567 353.949,233.045 357.124,236.22 U5.8@357.124,241.3 357.124,242.951 359.029,244.856 365.506,244.856 367.284,243.078 U5.12@367.284,241.3 367.284,240.284 C23.1@374.269,233.299
  Bottom Layer w1.27: v2@319.786,219.075 329.946,208.915 344.551,208.915 C21.1@354.076,218.44